# Altium PCB main_pcb.PcbDoc (part 1 of 2)
Units mm, origin at the board's own origin, x right, y up, seen from the top; angles counter-clockwise.
Board outline 134.57 x 151.73 mm, 2 copper layers (Top Layer, Bottom Layer); 69 components, 251 nets, 826 pads, 101 vias.
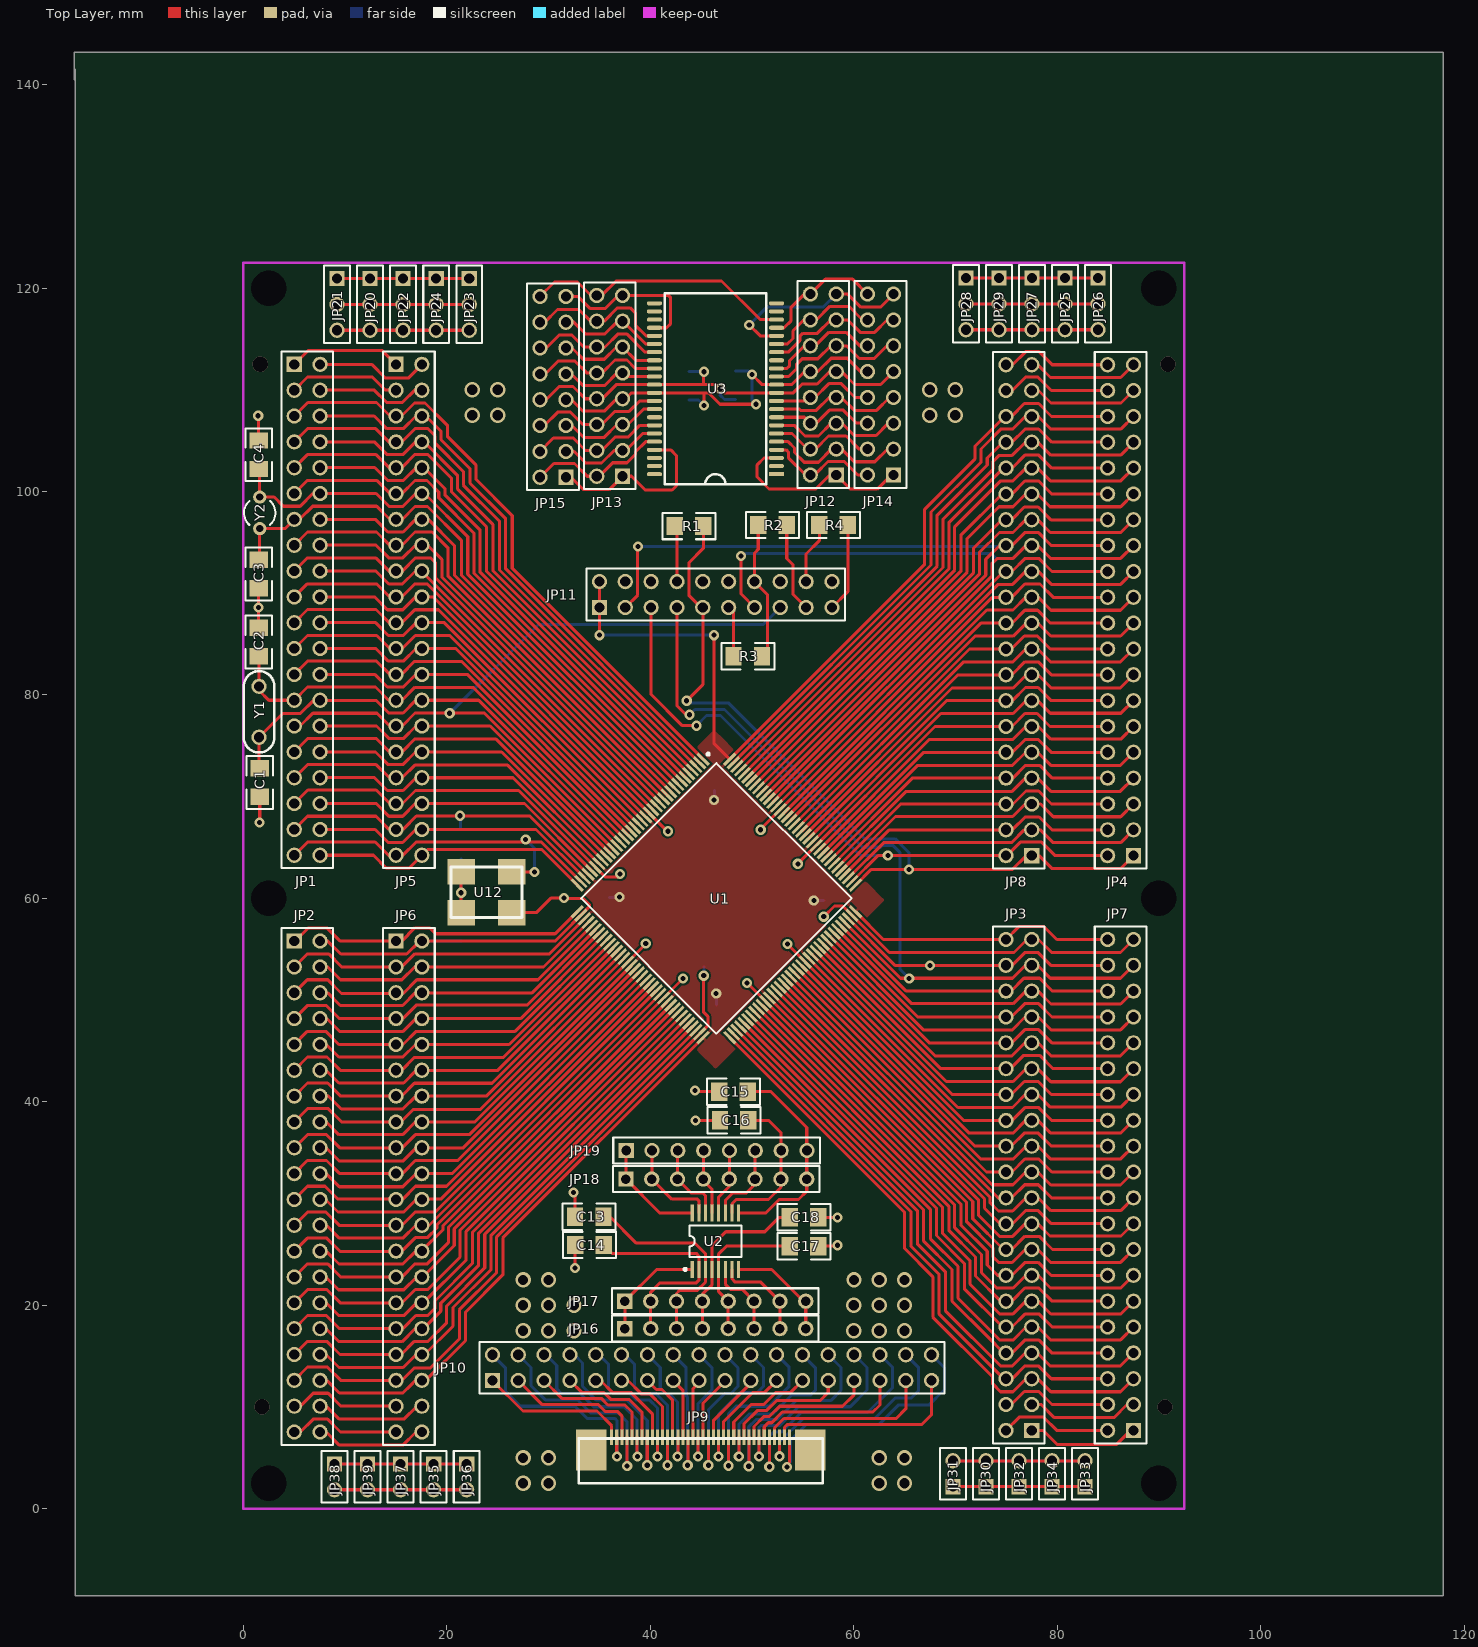
[diagram p0: Top Layer view]
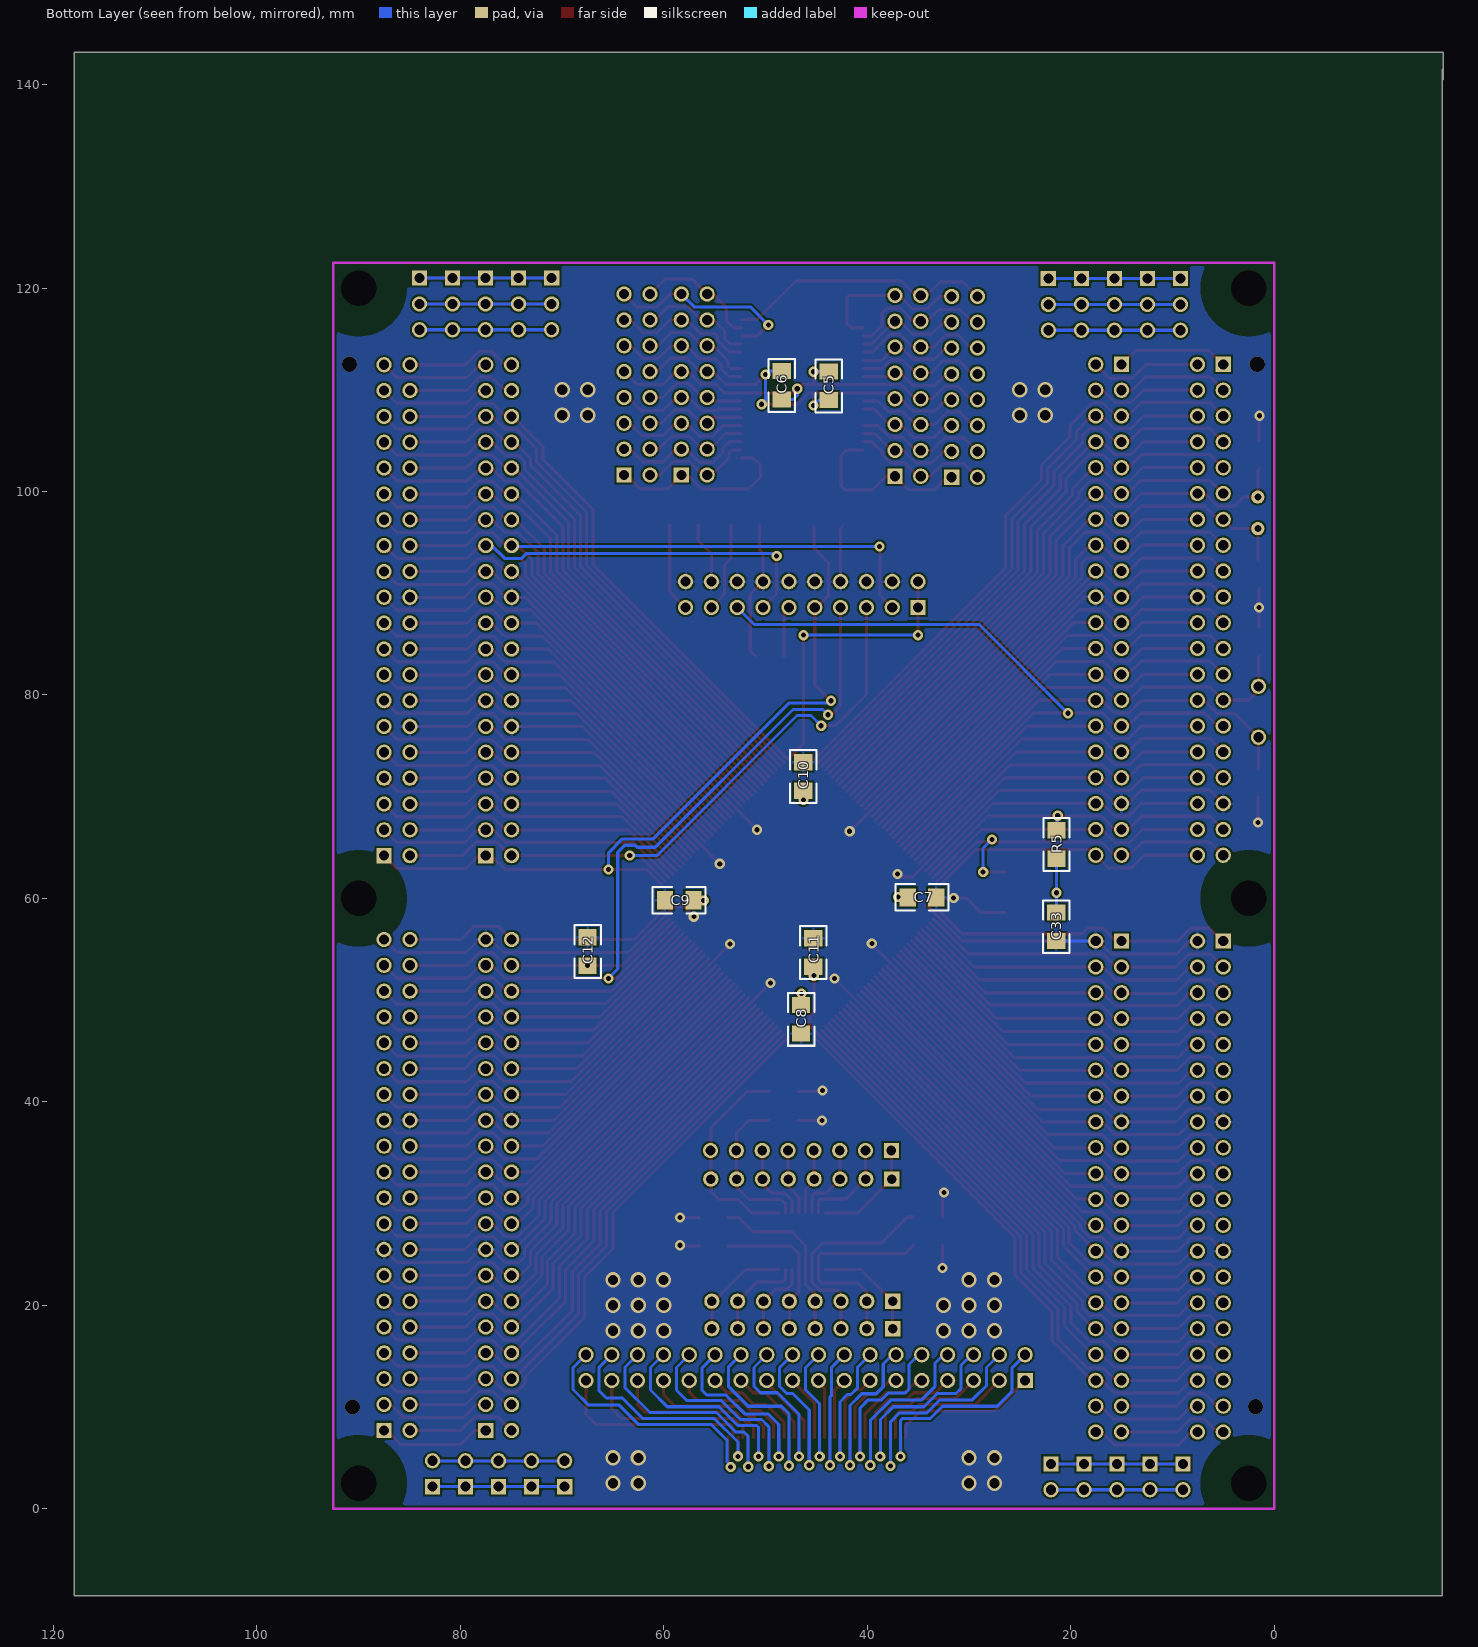
[diagram p1: Bottom Layer view, seen from below]

## Layer stack, top to bottom
Top Layer: signal copper 0.0356
Dielectric: dielectric 0.32, FR-4, Dk 4.8
Bottom Layer: signal copper 0.0356

## Board outline
-16.525,141.5 -16.525,-8.55 117.95,-8.55 117.95,143.175 -16.625,143.175 -16.625,140.5

## Design rules (kind name [scope] priority, off if disabled: settings)
Clearance Clearance_1 [HasPad('Free-0') vs InPoly] p1: gap=3
Clearance [All] p2: gap=0.2
ComponentClearance [All] p1: gap=0.254 collisioncheckmode=0
HoleSize [All] p1: absolutevalues=TRUE maxlimit=5 minlimit=0.4 maxpercent=80.000 minpercent=20.000
PolygonConnect [All] p1: connectstyle=Relief reliefconductorwidth=0.254 reliefentries=4 polygonreliefangle="90 Angle"
RoutingLayers [All] p1: top layer=Horizontal bottom layer=Vertical
RoutingVias [All] p1: holewidth=0.5 width=1 viastyle="Through Hole" minholewidth=0.4 minwidth=0.9 maxholewidth=1 maxwidth=1.5
SolderMaskExpansion [All] p1: expansion=0.102
TestPointUsage [All] p1: valid=0 allowmultiple=FALSE
Testpoint [All] p1: side=15 testpointundercomponent=TRUE minsize=1.016 maxsize=2.54 preferedsize=1.524 minholesize=0 maxholesize=1.016 preferedholesize=0.813 testpointgrid=0.025 style=1023 order=1234567890
Width [All] p1: maxlimit=2 minlimit=0.254 preferedwidth=0.254 toplayer_prefwidth=0.3 bottomlayer_prefwidth=0.3 minimp=50.000000 maximp=50.000000 favimp=50.000000
15 further rules are at their usual default settings.

## Components (designator, comment, footprint, x,y, rotation, side; value= is the part's Value field where it differs from the comment)
C1 "10" _1206 1.6,71.4 r90 top (schematic designator C?)
C2 "10" _1206 1.5,85.2 r270 top (schematic designator C?)
C3 "10" _1206 1.5,91.9 r90 top
C4 "10" _1206 1.5,103.6 r270 top
C5 "1.0" _1206 43.8,110.4 r90 bottom
C6 "1.0" _1206 48.39,110.424 r270 bottom
C7 "1.0" _1206 34.6,60.1 r180 bottom
C8 "1.0" _1206 46.5,48.1 r270 bottom
C9 "1.0" _1206 58.5,59.8 r0 bottom
C10 "1.0" _1206 46.3,72 r90 bottom
C11 "10.0" _1206 45.3,54.7 r90 bottom
C12 "10.0" _1206 67.5,54.8 r90 bottom
C13 "0.1" _1206 34,28.7 r0 top
C14 "0.1" _1206 34.027,25.933 r0 top
C15 "0.1" _1206 48.2,41 r0 top
C16 "0.1" _1206 48.252,38.185 r0 top
C17 "0.1" _1206 55.1,25.8 r180 top
C18 "0.1" _1206 55.098,28.64 r180 top
C33 "0.1" _1206 21.4,57.2 r270 bottom
JP1 "Header 20X2" HDR2X20#1 5,112.5 r270 top
JP2 "Header 20X2" HDR2X20#1 5,55.8 r270 top
JP3 "Header 20X2" HDR2X20#2 77.5,7.7 r90 top
JP4 "Header 20X2" HDR2X20#1 87.5,64.2 r90 top
JP5 "Header 20X2" HDR2X20#1 15,112.5 r270 top (schematic designator JP2)
JP6 "Header 20X2" HDR2X20#1 15,55.8 r270 top
JP7 "Header 20X2" HDR2X20#1 87.5,7.7 r90 top
JP8 "Header 20X2" HDR2X20#1 77.5,64.2 r90 top
JP9 "Header 36" 3-1734592-6 44.95,6.4 r0 top (schematic designator JP?)
JP10 "Header 36" HDR2X18 24.475,12.6 r0 top
JP11 "Header 10X2" HDR2X10 35,88.6 r0 top
JP12 "Header 16" HDR2X8 58.275,101.625 r90 top
JP13 "Header 16" HDR2X8 37.275,101.5 r90 top
JP14 "Header 16" HDR2X8 63.9,101.625 r90 top
JP15 "Header 16" HDR2X8 31.7,101.4 r90 top
JP16 "Header 8" HDR1X8 37.5,17.7 r0 top
JP17 "Header 8" HDR1X8 37.5,20.4 r0 top
JP18 "Header 8" HDR1X8 37.6,32.4 r0 top
JP19 "Header 8" HDR1X8 37.626,35.209 r0 top
JP20 "Header 3" HDR1X3 12.44,120.924 r270 top
JP21 "Header 3" HDR1X3 9.192,120.924 r270 top
JP22 "Header 3" HDR1X3 15.688,120.924 r270 top
JP23 "Header 3" HDR1X3 22.184,120.924 r270 top
JP24 "Header 3" HDR1X3 18.936,120.924 r270 top
JP25 "Header 3" HDR1X3 80.757,120.974 r270 top
JP26 "Header 3" HDR1X3 84.005,120.974 r270 top
JP27 "Header 3" HDR1X3 77.509,120.974 r270 top
JP28 "Header 3" HDR1X3 71.013,120.974 r270 top
JP29 "Header 3" HDR1X3 74.261,120.974 r270 top
JP30 "Header 2" HDR1X2 73.007,2.176 r90 top
JP31 "Header 2" HDR1X2 69.759,2.176 r90 top
JP32 "Header 2" HDR1X2 76.255,2.176 r90 top
JP33 "Header 2" HDR1X2 82.751,2.176 r90 top
JP34 "Header 2" HDR1X2 79.503,2.176 r90 top
JP35 "Header 2" HDR1X2 18.686,4.399 r270 top
JP36 "Header 2" HDR1X2 21.934,4.399 r270 top
JP37 "Header 2" HDR1X2 15.438,4.399 r270 top
JP38 "Header 2" HDR1X2 8.942,4.399 r270 top
JP39 "Header 2" HDR1X2 12.19,4.399 r270 top
R1 "10K" _1206 43.8,96.6 r180 top
R2 "10K" _1206 52,96.7 r180 top
R3 "10K" _1206 49.6,83.8 r0 top
R4 "10K" _1206 58,96.7 r180 top
R5 "1R" _1206 21.4,65.3 r90 bottom
U1 "STM32F207ZGT6" F-QFP20X20-G144/N 46.5,60 r315 top
U2 "TSC2046" TSSO5X6-G16 46.4,26.3 r0 top
U3 "K6R4008V1D" 44-TSOP2 46.4,110.1 r90 top
U12 "KXO-97-50MGz" KXO-97 23.9,60.6 r0 top
Y1 "10MGz" qwarz1 1.538,75.837 r90 top (schematic designator Y?)
Y2 "32768" BCY-W2/D3.1 1.6,97.9 r0 top

## Footprints (in the part's own frame and the unit in brackets; to place one, negate y for a bottom-side part, rotate by r counter-clockwise, add the part's x,y. Pads: shape width x height; smd on the part's side, far side on the other; paste and mask are expansions set on the pad)
3-1734592-6 [mm]
  rect 3x4 smd: 0(-10.75,-0.625) 0(10.75,-0.625)
  rect 0.3x1.5 smd: 1(-8.75,0.625) 2(-8.25,0.625) 3(-7.75,0.625) 4(-7.25,0.625) 5(-6.75,0.625) 6(-6.25,0.625) 7(-5.75,0.625) 8(-5.25,0.625) 9(-4.75,0.625) 10(-4.25,0.625) 11(-3.75,0.625) 12(-3.25,0.625) 13(-2.75,0.625) 14(-2.25,0.625) 15(-1.75,0.625) 16(-1.25,0.625) 17(-0.75,0.625) 18(-0.25,0.625) 19(0.25,0.625) 20(0.75,0.625) 21(1.25,0.625) 22(1.75,0.625) 23(2.25,0.625) 24(2.75,0.625) 25(3.25,0.625) 26(3.75,0.625) 27(4.25,0.625) 28(4.75,0.625) 29(5.25,0.625) 30(5.75,0.625) 31(6.25,0.625) 32(6.75,0.625) 33(7.25,0.625) 34(7.75,0.625) 35(8.25,0.625) 36(8.75,0.625)
  silkscreen extent -12,-3.9 12,0.5
44-TSOP2 [mm]
  rect 0.4x1.5 smd: 1(-8.4,-6)
  oval 0.4x1.5 smd: 2(-7.6,-6) 3(-6.8,-6) 4(-6,-6) 5(-5.2,-6) 6(-4.4,-6) 7(-3.6,-6) 8(-2.8,-6) 9(-2,-6) 10(-1.2,-6) 11(-0.4,-6) 12(0.4,-6) 13(1.2,-6) 14(2,-6) 15(2.8,-6) 16(3.6,-6) 17(4.4,-6) 18(5.2,-6) 19(6,-6) 20(6.8,-6) 21(7.6,-6) 22(8.4,-6) 23(8.4,6) 24(7.6,6) 25(6.8,6) 26(6,6) 27(5.2,6) 28(4.4,6) 29(3.6,6) 30(2.8,6) 31(2,6) 32(1.2,6) 33(0.4,6) 34(-0.4,6) 35(-1.2,6) 36(-2,6) 37(-2.8,6) 38(-3.6,6) 39(-4.4,6) 40(-5.2,6) 41(-6,6) 42(-6.8,6) 43(-7.6,6) 44(-8.4,6)
  silkscreen extent -9.4,-5 9.4,5
_1206 [mm]
  rect 1.6x1.8 smd: 1(-1.412,-0.007) 2(1.388,-0.007)
  silkscreen extent -2.61,-1.31 2.59,1.29
BCY-W2/D3.1 [mm]
  round 1.3 hole 0.7: 1(0,1.55) 2(0,-1.55)
  silkscreen extent -1.55,-1.19 1.55,1.17
F-QFP20X20-G144/N [mm]
  rect 1.6x0.3 smd: 1(-10.6,8.75) 2(-10.6,8.25) 3(-10.6,7.75) 4(-10.6,7.25) 5(-10.6,6.75) 6(-10.6,6.25) 7(-10.6,5.75) 8(-10.6,5.25) 9(-10.6,4.75) 10(-10.6,4.25) 11(-10.6,3.75) 12(-10.6,3.25) 13(-10.6,2.75) 14(-10.6,2.25) 15(-10.6,1.75) 16(-10.6,1.25) 17(-10.6,0.75) 18(-10.6,0.25) 19(-10.6,-0.25) 20(-10.6,-0.75) 21(-10.6,-1.25) 22(-10.6,-1.75) 23(-10.6,-2.25) 24(-10.6,-2.75) 25(-10.6,-3.25) 26(-10.6,-3.75) 27(-10.6,-4.25) 28(-10.6,-4.75) 29(-10.6,-5.25) 30(-10.6,-5.75) 31(-10.6,-6.25) 32(-10.6,-6.75) 33(-10.6,-7.25) 34(-10.6,-7.75) 35(-10.6,-8.25) 36(-10.6,-8.75) 73(10.6,-8.75) 74(10.6,-8.25) 75(10.6,-7.75) 76(10.6,-7.25) 77(10.6,-6.75) 78(10.6,-6.25) 79(10.6,-5.75) 80(10.6,-5.25) 81(10.6,-4.75) 82(10.6,-4.25) 83(10.6,-3.75) 84(10.6,-3.25) 85(10.6,-2.75) 86(10.6,-2.25) 87(10.6,-1.75) 88(10.6,-1.25) 89(10.6,-0.75) 90(10.6,-0.25) 91(10.6,0.25) 92(10.6,0.75) 93(10.6,1.25) 94(10.6,1.75) 95(10.6,2.25) 96(10.6,2.75) 97(10.6,3.25) 98(10.6,3.75) 99(10.6,4.25) 100(10.6,4.75) 101(10.6,5.25) 102(10.6,5.75) 103(10.6,6.25) 104(10.6,6.75) 105(10.6,7.25) 106(10.6,7.75) 107(10.6,8.25) 108(10.6,8.75)
  rect 0.3x1.6 smd: 37(-8.75,-10.6) 38(-8.25,-10.6) 39(-7.75,-10.6) 40(-7.25,-10.6) 41(-6.75,-10.6) 42(-6.25,-10.6) 43(-5.75,-10.6) 44(-5.25,-10.6) 45(-4.75,-10.6) 46(-4.25,-10.6) 47(-3.75,-10.6) 48(-3.25,-10.6) 49(-2.75,-10.6) 50(-2.25,-10.6) 51(-1.75,-10.6) 52(-1.25,-10.6) 53(-0.75,-10.6) 54(-0.25,-10.6) 55(0.25,-10.6) 56(0.75,-10.6) 57(1.25,-10.6) 58(1.75,-10.6) 59(2.25,-10.6) 60(2.75,-10.6) 61(3.25,-10.6) 62(3.75,-10.6) 63(4.25,-10.6) 64(4.75,-10.6) 65(5.25,-10.6) 66(5.75,-10.6) 67(6.25,-10.6) 68(6.75,-10.6) 69(7.25,-10.6) 70(7.75,-10.6) 71(8.25,-10.6) 72(8.75,-10.6) 109(8.75,10.6) 110(8.25,10.6) 111(7.75,10.6) 112(7.25,10.6) 113(6.75,10.6) 114(6.25,10.6) 115(5.75,10.6) 116(5.25,10.6) 117(4.75,10.6) 118(4.25,10.6) 119(3.75,10.6) 120(3.25,10.6) 121(2.75,10.6) 122(2.25,10.6) 123(1.75,10.6) 124(1.25,10.6) 125(0.75,10.6) 126(0.25,10.6) 127(-0.25,10.6) 128(-0.75,10.6) 129(-1.25,10.6) 130(-1.75,10.6) 131(-2.25,10.6) 132(-2.75,10.6) 133(-3.25,10.6) 134(-3.75,10.6) 135(-4.25,10.6) 136(-4.75,10.6) 137(-5.25,10.6) 138(-5.75,10.6) 139(-6.25,10.6) 140(-6.75,10.6) 141(-7.25,10.6) 142(-7.75,10.6) 143(-8.25,10.6) 144(-8.75,10.6)
  silkscreen extent -10.72,-9.4 9.4,9.57
HDR1X2 [mm]
  rect 1.5x1.5 hole 1: 1(-0.005,0.012)
  round 1.5 hole 1: 2(2.535,0.012)
  silkscreen extent -1.28,-1.26 3.8,1.28
HDR1X3 [mm]
  rect 1.5x1.5 hole 1: 1(-0.009,0.011)
  round 1.5 hole 1: 2(2.531,0.011) 3(5.071,0.011)
  silkscreen extent -1.28,-1.26 6.34,1.28
HDR1X8 [mm]
  rect 1.5x1.5 hole 0.95: 1(-0.001,0.002)
  round 1.5 hole 0.95: 2(2.539,0.002) 3(5.079,0.002) 4(7.619,0.002) 5(10.159,0.002) 6(12.699,0.002) 7(15.239,0.002) 8(17.779,0.002)
  silkscreen extent -1.27,-1.27 19.05,1.27
HDR2X8 [mm]
  rect 1.5x1.5 hole 1: 1(0,0)
  round 1.5 hole 1: 2(0,2.54) 3(2.54,0) 4(2.54,2.54) 5(5.08,0) 6(5.08,2.54) 7(7.62,0) 8(7.62,2.54) 9(10.16,0) 10(10.16,2.54) 11(12.7,0) 12(12.7,2.54) 13(15.24,0) 14(15.24,2.54) 15(17.78,0) 16(17.78,2.54)
  silkscreen extent -1.27,-1.27 19.05,3.81
HDR2X10 [mm]
  rect 1.5x1.5 hole 1: 1(0,0)
  round 1.5 hole 1: 2(0,2.54) 3(2.54,0) 4(2.54,2.54) 5(5.08,0) 6(5.08,2.54) 7(7.62,0) 8(7.62,2.54) 9(10.16,0) 10(10.16,2.54) 11(12.7,0) 12(12.7,2.54) 13(15.24,0) 14(15.24,2.54) 15(17.78,0) 16(17.78,2.54) 17(20.32,0) 18(20.32,2.54) 19(22.86,0) 20(22.86,2.54)
  silkscreen extent -1.27,-1.27 24.13,3.81
HDR2X18 [mm]
  rect 1.5x1.5 hole 1: 1(0,0)
  round 1.5 hole 1: 2(0,2.54) 3(2.54,0) 4(2.54,2.54) 5(5.08,0) 6(5.08,2.54) 7(7.62,0) 8(7.62,2.54) 9(10.16,0) 10(10.16,2.54) 11(12.7,0) 12(12.7,2.54) 13(15.24,0) 14(15.24,2.54) 15(17.78,0) 16(17.78,2.54) 17(20.32,0) 18(20.32,2.54) 19(22.86,0) 20(22.86,2.54) 21(25.4,0) 22(25.4,2.54) 23(27.94,0) 24(27.94,2.54) 25(30.48,0) 26(30.48,2.54) 27(33.02,0) 28(33.02,2.54) 29(35.56,0) 30(35.56,2.54) 31(38.1,0) 32(38.1,2.54) 33(40.64,0) 34(40.64,2.54) 35(43.18,0) 36(43.18,2.54)
  silkscreen extent -1.27,-1.27 44.45,3.81
HDR2X20#1 [mm]
  rect 1.5x1.5 hole 1: 1(0,0)
  round 1.5 hole 1: 2(0,2.54) 3(2.54,0) 4(2.54,2.54) 5(5.08,0) 6(5.08,2.54) 7(7.62,0) 8(7.62,2.54) 9(10.16,0) 10(10.16,2.54) 11(12.7,0) 12(12.7,2.54) 13(15.24,0) 14(15.24,2.54) 15(17.78,0) 16(17.78,2.54) 17(20.32,0) 18(20.32,2.54) 19(22.86,0) 20(22.86,2.54) 21(25.4,0) 22(25.4,2.54) 23(27.94,0) 24(27.94,2.54) 25(30.48,0) 26(30.48,2.54) 27(33.02,0) 28(33.02,2.54) 29(35.56,0) 30(35.56,2.54) 31(38.1,0) 32(38.1,2.54) 33(40.64,0) 34(40.64,2.54) 35(43.18,0) 36(43.18,2.54) 37(45.72,0) 38(45.72,2.54) 39(48.26,0) 40(48.26,2.54)
  silkscreen extent -1.27,-1.27 49.53,3.81
HDR2X20#2 [mm]
  rect 1.5x1.5 hole 1: 1(0,0)
  round 1.5 hole 1: 2(0,2.54) 3(2.54,0) 4(2.54,2.54) 5(5.08,0) 6(5.08,2.54) 7(7.62,0) 8(7.62,2.54) 9(10.16,0) 10(10.16,2.54) 11(12.7,0) 12(12.7,2.54) 13(15.24,0) 14(15.24,2.54) 15(17.78,0) 16(17.78,2.54) 17(20.32,0) 18(20.32,2.54) 19(22.86,0) 20(22.86,2.54) 21(25.4,0) 22(25.4,2.54) 23(27.94,0) 24(27.94,2.54) 25(30.48,0) 26(30.475,2.525) 27(33.02,0) 28(33.02,2.54) 29(35.56,0) 30(35.56,2.54) 31(38.1,0) 32(38.1,2.54) 33(40.64,0) 34(40.64,2.54) 35(43.18,0) 36(43.18,2.54) 37(45.72,0) 38(45.72,2.54) 39(48.26,0) 40(48.26,2.54)
  silkscreen extent -1.27,-1.27 49.53,3.81
KXO-97 [mm]
  rect 2.7x2.5 smd: 1(-2.5,-2) 2(2.5,-2) 3(2.5,2) 4(-2.5,2)
  silkscreen extent -3.5,-2.5 3.5,2.5
qwarz1 [mm]
  round 1.5 hole 1: 1(0.008,0) 2(5.008,0)
  silkscreen extent -1.49,-1.5 6.51,1.5
TSSO5X6-G16 [mm]
  rect 0.3x1.65 smd: 1(-2.275,-2.775) 2(-1.625,-2.775) 3(-0.975,-2.775) 4(-0.325,-2.775) 5(0.325,-2.775) 6(0.975,-2.775) 7(1.625,-2.775) 8(2.275,-2.775) 9(2.275,2.775) 10(1.625,2.775) 11(0.975,2.775) 12(0.325,2.775) 13(-0.325,2.775) 14(-0.975,2.775) 15(-1.625,2.775) 16(-2.275,2.775)
  silkscreen extent -3.1,-2.9 2.55,1.55

## Part data
C1 C2 C3 C4 C5 C6 C7 C8 C9 C10 C11 C12 C13 C14 C15 C16 C17 C18: library part "Cap Semi", "Capacitor"
C33: library part "Cap Semi", "Capacitor (Semiconductor SIM Model)"
JP1 JP2 JP3 JP4 JP5 JP6 JP7 JP8: "Header, 20-Pin, Dual row"
JP9 JP10: "Header, 36-Pin"
JP11: "Header, 10-Pin, Dual row"
JP12 JP13 JP14 JP15: "Header, 16-Pin"
JP16 JP17 JP18 JP19: "Header, 8-Pin"
JP20 JP21 JP22 JP23 JP24 JP25 JP26 JP27 JP28 JP29: "Header, 3-Pin"
JP30 JP31 JP32 JP33 JP34 JP35 JP36 JP37 JP38 JP39: "Header, 2-Pin"
R1 R2 R3 R4 R5: library part Res2, "Resistor"
U1: "STM32 ARM-based 32-bit MCU Connectivity Line & Ethernet with 1024 kB Flash, 128 kB Internal RAM, -40 to +85°C Temperature, 144-Pin LQFP, Tray"
U12: library part KXO-97
Y1 Y2: library part XTAL, "Crystal Oscillator"

## Free pads (board coordinates)
  round 3 hole 3.5: 0(2.5,2.5) 0(2.5,60) 0(2.5,120) 0(90,2.5) 0(90,60) 0(90,120)

## Via types
v1: diameter 1, hole 0.5, Top Layer to Bottom Layer, 64 vias
v2: diameter 1.5, hole 1, Top Layer to Bottom Layer, 33 vias
v3: diameter 1.5, hole 1.5, Top Layer to Bottom Layer, 4 vias

## Nets (pads, with @x,y where several pads share a name; then routed paths per layer and width w, separated by ;. In a path a pad name is that pad's centre, name@x,y a point inside that pad or via, vN(x,y) a via of type N, cw(c..) or ccw(c..) an arc to the next point about the centre after c; other vN are vias at no path point)
+3V3: C7.1 C8.1 C9.1 C10.1 JP1.21 JP1.34 JP1.37 JP2.3 JP2.16 JP2.26 JP2.36 JP3.16 JP3.27 JP3.40 JP4.13 JP4.23 JP4.36 JP5.21 JP5.34 JP5.37 JP6.3 JP6.16 JP6.26 JP6.36 JP7.16 JP7.27 JP7.40 JP8.13 JP8.23 JP8.36 JP11.1 JP11.2 R5.2 U1.17 U1.30 U1.33 U1.39 U1.52 U1.62 U1.72 U1.84 U1.95 U1.108 U1.121 U1.131 U1.144 | length 567.8
  Top Layer w0.3: JP2.3@5,53.26 6.29,54.55 8.375,54.55 9.65,53.275 15.575,53.275 16.85,54.55 30.09,54.55 U1.39@33.525,57.985 ; JP1.37@5,66.78 6.295,68.075 13.025,68.075 14.3,66.8 15.7,66.8 17,68.1 28.147,68.1 U1.33@33.878,62.369 ; JP1.21@5,87.1 6.3,88.4 13.025,88.4 14.325,87.1 15.575,87.1 16.85,88.375 19.186,88.375 U1.17@39.535,68.026 ; JP2.36@7.54,12.62 8.18,12.62 9.425,11.375 15.675,11.375 16.4,12.1 16.92,12.62 17.92,12.62 21.825,16.525 21.825,19.325 25.5,23 25.5,26.626 U1.72@45.192,46.317 ; JP2.26@7.54,25.32 8.13,25.32 9.4,24.05 15.675,24.05 16.945,25.32 JP6.26@17.54,25.32 17.545,25.325 17.545,25.345 19.6,27.4 19.6,27.797 U1.62@41.656,49.853 ; JP2.16@7.54,38.02 8.13,38.02 9.375,36.775 15.65,36.775 16.895,38.02 22.752,38.02 U1.52@38.121,53.389 ; JP1.34@7.54,71.86 7.555,71.875 12.875,71.875 14.15,70.6 15.7,70.6 16.96,71.86 JP5.34@17.54,71.86 26.508,71.86 U1.30@34.939,63.429 ; v1(35,85.875) JP11.2@35,91.14 ; v1(46.25,85.875) 46.25,75.241 U1.144@47.808,73.682 66.975,92.849 66.975,98.25 71.9,103.175 71.9,104.425 74.855,107.38 JP8.36@74.96,107.38 74.98,107.4 75.525,107.4 76.775,108.65 78.175,108.65 79.445,107.38 JP4.36@84.96,107.38 ; U1.84@51.697,50.207 71.7,30.204 71.7,28.5 74.72,25.48 JP3.16@74.96,25.48 75.53,25.48 76.825,26.775 78.25,26.775 79.545,25.48 JP7.16@84.96,25.48 ; U1.131@52.404,69.086 74.193,90.875 75.625,90.875 76.9,92.15 78.15,92.15 79.425,90.875 86.235,90.875 JP4.23@87.5,92.14 ; U1.95@55.586,54.096 70.232,39.45 75.6,39.45 76.87,40.72 78.08,40.72 79.325,39.475 86.255,39.475 JP7.27@87.5,40.72 ; U1.121@55.94,65.551 68.564,78.175 75.675,78.175 76.94,79.44 78.085,79.44 79.325,78.2 86.26,78.2 JP4.13@87.5,79.44 ; U1.108@60.183,58.692 62.914,55.96 JP3.40@74.96,55.96 76.225,57.225 78.7,57.225 79.965,55.96 JP7.40@84.96,55.96
  Bottom Layer w0.3: v1(21.275,68.125) 21.325,68.075 R5.2@21.325,66.78 ; v1(35,85.875) v1(46.25,85.875) ; C7.1@36.012,60.093 36.943,60.093 v1(36.975,60.125) ; v1(46.275,69.675) 46.293,69.693 C10.1@46.293,70.587 ; v1(46.475,50.662) 46.506,50.631 C8.1@46.506,49.512 ; v1(56.075,59.8) 56.082,59.807 C9.1@57.087,59.807
A0: JP12.1 JP14.1 U3.3 | length 19
  Top Layer w0.3: U3.3@52.4,103.3 51.175,103.3 50.5,102.625 50.5,101.425 51.675,100.25 56.275,100.25 57.65,101.625 JP12.1@58.275,101.625 59.675,100.225 62.3,100.225 63.7,101.625 JP14.1@63.9,101.625
A1: JP12.2 JP14.2 U3.4 | length 11.5
  Top Layer w0.3: U3.4@52.4,104.1 53.35,104.1 53.575,103.875 53.575,103.325 55.275,101.625 JP12.2@55.735,101.625 56.325,101.625 56.325,101.8 57.475,102.95 59.075,102.95 60.4,101.625 JP14.2@61.4,101.625
A2: JP12.3 JP14.3 U3.5 | length 14.2
  Top Layer w0.3: U3.5@52.4,104.9 53.55,104.9 54.175,104.275 54.175,103.825 55.125,102.875 56.525,102.875 57.8,104.15 58.26,104.15 JP12.3@58.275,104.165 58.81,104.165 60.05,102.925 62.075,102.925 63.315,104.165 JP14.3@63.9,104.165
A3: JP12.4 JP14.4 U3.6 | length 10.7
  Top Layer w0.3: U3.6@52.4,105.7 53.925,105.7 55.45,104.175 56.25,104.175 57.525,105.45 59.25,105.45 60.535,104.165 JP14.4@61.36,104.165
A4: JP12.5 JP14.5 U3.7 | length 13.5
  Top Layer w0.3: U3.7@52.4,106.5 54.15,106.5 55.2,105.45 56.525,105.45 57.78,106.705 58.845,106.705 60.05,105.5 62.2,105.5 63.405,106.705 JP14.5@63.9,106.705
A5: JP12.13 JP14.13 U3.16 | length 14.1
  Top Layer w0.3: U3.16@52.4,113.7 53.575,113.7 54.7,114.825 54.7,115.25 55,115.55 56.425,115.55 57.74,116.865 58.86,116.865 59.41,116.865 60.625,115.65 62.05,115.65 63.265,116.865 JP14.13@63.9,116.865
A6: JP12.14 JP14.14 U3.17 | length 11.5
  Top Layer w0.3: U3.17@52.4,114.5 53.475,114.5 54.025,115.05 54.025,115.8 54.666,116.441 55.09,116.865 56.315,116.865 57.65,118.2 59.525,118.2 60.86,116.865 JP14.14@61.36,116.865
A7: JP12.15 JP14.15 U3.18 | length 19.6
  Top Layer w0.3: v1(49.725,116.375) 50.8,115.3 U3.18@52.4,115.3 ; JP12.15@58.275,119.405 59.42,119.405 60.7,118.125 62.62,118.125 JP14.15@63.9,119.405
  Bottom Layer w0.3: v1(49.725,116.375) 51.5,118.15 57.02,118.15 JP12.15@58.275,119.405
A8: JP12.16 JP14.16 U3.19 | length 12.3
  Top Layer w0.3: U3.19@52.4,116.1 53.15,116.1 53.85,116.8 53.85,118.125 55.13,119.405 JP12.16@55.735,119.405 57.205,120.875 59.89,120.875 JP14.16@61.36,119.405
A9: JP13.16 JP15.16 U3.20 | length 26.6
  Top Layer w0.3: JP15.16@29.16,119.18 30.58,120.6 32.85,120.6 34.225,119.225 34.68,119.225 JP13.16@34.735,119.28 35.23,119.28 36.65,120.7 47,120.7 50.8,116.9 U3.20@52.4,116.9
A10: JP13.15 JP15.15 U3.26 | length 15.7
  Top Layer w0.3: JP15.15@31.7,119.18 32.87,119.18 34.05,118 35.6,118 36.88,119.28 41.77,119.28 42,119.05 42,116.5 41.6,116.1 U3.26@40.4,116.1
A11: JP13.14 JP15.14 U3.27 | length 14.6
  Top Layer w0.3: JP15.14@29.16,116.64 29.615,116.64 30.875,117.9 32.975,117.9 34.135,116.74 JP13.14@34.735,116.74 35.465,116.74 36.775,118.05 38.025,118.05 38.525,117.55 38.525,116.35 39.575,115.3 U3.27@40.4,115.3
A12: JP13.13 JP15.13 U3.28 | length 10.6
  Top Layer w0.3: JP15.13@31.7,116.64 32.485,116.64 33.65,115.475 35.525,115.475 36.79,116.74 37.31,116.74 39.55,114.5 U3.28@40.4,114.5
A13: JP13.12 JP15.12 U3.29 | length 13.6
  Top Layer w0.3: JP15.12@29.16,114.1 29.775,114.1 31.075,115.4 32.25,115.4 33.45,114.2 JP13.12@34.735,114.2 35.55,114.2 36.85,115.5 37.675,115.5 39.475,113.7 U3.29@40.4,113.7
A14: JP13.11 JP15.11 U3.30 | length 10.2
  Top Layer w0.3: JP15.11@31.7,114.1 32.3,114.1 33.4,113 35.475,113 36.675,114.2 JP13.11@37.275,114.2 38.575,112.9 U3.30@40.4,112.9
A15: JP13.4 JP15.4 U3.38 | length 13.3
  Top Layer w0.3: JP15.4@29.16,103.94 30.47,105.25 32.425,105.25 33.635,104.04 35.24,104.04 36.575,105.375 37.85,105.375 38.975,106.5 U3.38@40.4,106.5
A16: JP13.3 JP15.3 U3.39 | length 10.1
  Top Layer w0.3: JP15.3@31.7,103.94 32.51,103.94 33.65,102.8 35.2,102.8 36.44,104.04 JP13.3@37.275,104.04 ; JP13.3@37.59,104.04 39.25,105.7 U3.39@40.4,105.7
A17: JP13.2 JP15.2 U3.40 | length 13.9
  Top Layer w0.3: JP15.2@29.16,101.4 30.51,102.75 32.55,102.75 33.8,101.5 JP13.2@34.735,101.5 34.975,101.5 36.3,102.825 37.7,102.825 38.55,103.675 38.55,103.9 39.55,104.9 U3.40@40.4,104.9
A18: JP13.1 JP15.1 U3.41 | length 18
  Top Layer w0.3: JP15.1@31.7,101.4 32.2,101.4 33.425,100.175 35.95,100.175 JP13.1@37.275,101.5 38.15,101.5 39.5,100.15 42.15,100.15 42.575,100.575 42.575,103.525 42,104.1 U3.41@40.4,104.1
BOOT0: JP4.30 JP8.30 U1.138 | length 49.8
  Top Layer w0.3: U1.138@49.929,71.561 70.525,92.157 70.525,95.7 74.585,99.76 JP8.30@74.96,99.76 74.975,99.775 75.575,99.775 76.825,101.025 78.2,101.025 79.465,99.76 JP4.30@84.96,99.76
CS: JP12.6 JP14.6 U3.8 | length 10.3
  Top Layer w0.3: U3.8@52.4,107.3 55.14,107.3 55.74,106.7 56.3,106.7 57.6,108 58.975,108 60.25,106.725 61.34,106.725 JP14.6@61.36,106.705
D0: JP12.7 JP14.7 U3.9 | length 13.1
  Top Layer w0.3: U3.9@52.4,108.1 54.65,108.1 54.775,107.975 56.325,107.975 57.595,109.245 58.78,109.245 60.05,107.975 62.25,107.975 63.52,109.245 JP14.7@63.9,109.245
D1: JP12.8 JP14.8 U3.10 | length 10.2
  Top Layer w0.3: U3.10@52.4,108.9 55.39,108.9 JP12.8@55.735,109.245 56.195,109.245 57.55,110.6 58.775,110.6 60.13,109.245 JP14.8@61.36,109.245
D2: JP12.11 JP14.11 U3.13 | length 14
  Top Layer w0.3: U3.13@52.4,111.3 53.6,111.3 54.35,112.05 54.35,112.475 54.925,113.05 56.475,113.05 57.725,114.3 59.325,114.3 60.55,113.075 62.025,113.075 63.275,114.325 JP14.11@63.9,114.325
D3: JP12.12 JP14.12 U3.14 | length 11.3
  Top Layer w0.3: U3.14@52.4,112.1 53.425,112.1 53.7,112.375 53.7,112.875 55.15,114.325 56.225,114.325 57.55,115.65 59.25,115.65 60.575,114.325 JP14.12@61.36,114.325
D4: JP13.10 JP15.10 U3.31 | length 13.1
  Top Layer w0.3: JP15.10@29.16,111.56 29.685,111.56 30.975,112.85 32.55,112.85 33.74,111.66 JP13.10@34.735,111.66 35.26,111.66 36.525,112.925 37.7,112.925 38.525,112.1 U3.31@40.4,112.1
D5: JP13.9 JP15.9 U3.32 | length 9.9
  Top Layer w0.3: JP15.9@31.7,111.56 32.24,111.56 33.4,110.4 35.5,110.4 36.76,111.66 JP13.9@37.275,111.66 37.635,111.3 U3.32@40.4,111.3
D6: JP13.6 JP15.6 U3.35 | length 13.3
  Top Layer w0.3: JP15.6@29.16,106.48 29.58,106.48 30.9,107.8 32.15,107.8 33.37,106.58 34.095,106.58 JP13.6@34.735,106.58 35.23,106.58 36.525,107.875 37.925,107.875 38.95,108.9 U3.35@40.4,108.9
D7: JP13.5 JP15.5 U3.36 | length 10.3
  Top Layer w0.3: JP15.5@31.7,106.48 32.27,106.48 33.425,105.325 35.475,105.325 36.73,106.58 JP13.5@37.275,106.58 37.805,106.58 39.325,108.1 U3.36@40.4,108.1
GND: C1.1 C2.1 C3.1 C4.1 C7.2 C8.2 C9.2 C10.2 C11.2 C12.2 C13.1 C14.1 C15.1 C16.1 C17.1 C18.1 C33.2 JP1.20 JP1.35 JP2.2 JP2.15 JP2.25 JP3.15 JP3.26 JP3.39 JP4.12 JP4.22 JP5.20 JP5.35 JP6.2 JP6.15 JP6.25 JP7.15 JP7.26 JP7.39 JP8.12 JP8.22 JP11.4 JP11.6 JP11.8 JP11.10 JP11.12 JP11.14 JP11.16 JP11.18 JP11.20 R1.2 R2.2 R3.2 R4.2 U1.16 U1.31 U1.38 U1.51 U1.61 U1.83 U1.94 U1.107 U1.120 U1.130 U12.2 | length 473.5
  Top Layer w0.3: v1(1.45,107.45) 1.493,107.407 C4.1@1.493,105.012 ; C2.1@1.493,86.612 1.493,90.474 C3.1@1.507,90.488 ; v1(1.575,67.45) 1.607,67.482 C1.1@1.607,69.988 ; JP2.25@5,25.32 6.28,26.6 8.2,26.6 9.5,25.3 15.55,25.3 16.9,26.65 18.075,26.65 19.025,27.6 19.025,27.929 U1.61@41.303,50.207 43.221,52.125 v1(43.225,52.125) ; JP2.15@5,38.02 6.305,39.325 8.35,39.325 9.655,38.02 15.47,38.02 16.675,39.225 23.25,39.225 39.55,55.525 v1(39.55,55.55) ; JP1.35@5,69.32 6.33,70.65 13.05,70.65 14.38,69.32 15.645,69.32 16.925,70.6 27.061,70.6 35.561,62.1 36.75,62.1 37.05,62.4 v1(37.025,62.4) ; JP2.2@7.54,55.8 8.3,55.8 9.575,54.525 16.05,54.525 17.325,55.8 30.633,55.8 34,59.167 34,59.375 33.4,59.975 31.55,59.975 v1(31.5,60.025) 30.225,60.025 28.8,58.6 U12.2@26.4,58.6 ; JP1.20@7.54,89.64 12.885,89.64 14.15,88.375 15.675,88.375 16.94,89.64 18.628,89.64 41.668,66.6 v1(41.725,66.6) ; v1(32.45,31.075) 32.588,30.937 C13.1@32.588,28.693 ; v1(32.6,23.65) 32.615,23.665 C14.1@32.615,25.926 ; R1.2@42.412,96.607 42.62,96.399 JP11.8@42.62,91.14 ; v1@44.3,38.175 44.55,38.175 44.553,38.178 C16.1@46.84,38.178 ; v1(44.4,41.1) 44.507,40.993 C15.1@46.788,40.993 ; v1(49.5,51.697) 71.1,30.097 71.1,28.2 73.675,25.625 73.675,24.775 74.25,24.2 75.575,24.2 76.855,25.48 78.095,25.48 79.35,24.225 86.245,24.225 JP7.15@87.5,25.48 ; R2.2@50.612,96.707 50.612,94.312 50.24,93.94 JP11.14@50.24,91.14 51.5,89.88 51.5,84.306 R3.2@50.988,83.793 ; v1(50.85,66.75) 50.85,66.825 73.625,89.6 75.525,89.6 76.825,90.9 78.3,90.9 79.6,89.6 JP4.22@84.96,89.6 ; v1(53.5,55.5) 53.5,55.475 U1.94@55.233,53.742 70.795,38.18 74.97,38.18 75.58,38.18 76.825,39.425 78.2,39.425 79.445,38.18 JP7.26@84.96,38.18 JP7.26@84.955,38.175 ; v1(54.5,63.4) 54.5,63.404 67.996,76.9 75.55,76.9 76.825,78.175 78.025,78.175 79.3,76.9 JP4.12@84.96,76.9 ; JP11.18@55.3,91 55.3,93.85 56.612,95.162 R4.2@56.612,96.707 ; C18.1@56.51,28.647 58.378,28.647 v1(58.4,28.625) ; C17.1@56.512,25.807 58.307,25.807 v1(58.4,25.9) ; v1(57.05,58.2) 58.11,59.26 58.908,59.26 63.492,54.675 75.75,54.675 77.035,55.96 78.165,55.96 79.45,54.675 86.215,54.675 JP7.39@87.5,55.96
  Bottom Layer w0.3: JP6.2@17.54,55.8 17.552,55.812 C33.2@21.407,55.812
  other v1: 44.45,38.175 1.493,88.6
  other v2: 27.5,2.5 30,2.5 62.5,2.5 65,2.5 27.5,5 30,5 62.5,5 65,5 27.5,17.5 30,17.5 32.5,17.5 60,17.5 62.5,17.5 65,17.5 27.5,20 30,20 32.5,20 60,20 62.5,20 65,20 27.5,22.5 30,22.5 60.025,22.5 62.5,22.5 65,22.5 22.5,107.5 25,107.5 67.475,107.5 69.975,107.5 22.5,110 25,110 67.475,110 69.975,110
  other v3: 90.6,10 1.825,10.025 1.65,112.5 90.9,112.5
GND_SRAM: C5.1 C6.1 JP12.10 JP13.7 JP14.10 JP15.7 U3.12 U3.34 | length 41.5
  Top Layer w0.3: JP15.7@31.7,109.02 32.255,109.02 33.375,107.9 35.475,107.9 36.695,109.12 37.57,109.12 38.15,109.7 45.725,109.7 46.85,108.575 v1(50.375,108.575) ; v1(45.275,108.45) 45.275,109.7 ; v1(50,111.5) 51,110.5 53.875,110.5 55.175,111.8 56.475,111.8 57.775,113.1 59.375,113.1 60.69,111.785 JP14.10@61.36,111.785
  Bottom Layer w0.3: C5.1@43.793,108.988 44.737,108.988 v1(45.275,108.45) ; C6.1@48.396,111.836 49.664,111.836 v1(50,111.5) 50,108.95 v1(50.375,108.575)
NetC13_2: C13.2 JP16.3 JP17.3 U2.3 | length 21.1
  Top Layer w0.3: C13.2@35.388,28.693 36.032,28.693 38.625,26.1 44.4,26.1 45.425,25.075 U2.3@45.425,23.525 45.425,22.275 44.625,21.475 42.9,21.475 42.579,21.154 JP17.3@42.579,20.402 JP16.3@42.579,17.702
NetC14_2: C14.2 JP16.2 JP17.2 U2.2 | length 21
  Top Layer w0.3: C14.2@35.415,25.926 36.241,25.1 44.525,25.1 44.775,24.85 44.775,22.45 44.525,22.2 40.95,22.2 40.039,21.289 JP16.2@40.039,17.702
NetC15_2: C15.2 JP18.8 JP19.8 U2.9 | length 21.1
  Top Layer w0.3: U2.9@48.675,29.075 51.35,29.075 52.675,30.4 54.575,30.4 55.379,31.204 55.379,37.471 51.857,40.993 C15.2@49.588,40.993
NetC16_2: C16.2 JP18.7 JP19.7 U2.10 | length 15.5
  Top Layer w0.3: U2.10@48.025,29.075 48.025,29.975 48.45,30.4 51.625,30.4 52.839,31.614 JP18.7@52.839,32.402 52.865,32.428 52.865,36.935 51.622,38.178 C16.2@49.64,38.178
NetC17_2: C17.2 JP16.5 JP17.5 U2.5 | length 15
  Top Layer w0.3: JP16.5@47.659,17.702 JP17.5@47.659,20.402 46.725,21.335 46.725,25.05 47.482,25.807 C17.2@53.712,25.807
NetC18_2: C18.2 JP16.4 JP17.4 U2.4 | length 17.4
  Top Layer w0.3: JP16.4@45.119,17.702 JP17.4@45.119,20.402 45.119,21.069 46.075,22.025 U2.4@46.075,23.525 46.075,25.875 47.425,27.225 51.25,27.225 52.672,28.647 C18.2@53.71,28.647
NetC33_1: C33.1 R5.1 U12.1 U12.4 | length 9.3
  Top Layer w0.3: U12.1@21.4,58.6 21.407,58.607 v1(21.407,60.55) 21.4,60.557 U12.4@21.4,62.6
  Bottom Layer w0.3: R5.1@21.393,63.888 21.407,63.874 C33.1@21.407,58.612
NetJP1_1: JP1.1 JP5.1 | length 11.1
  Top Layer w0.3: JP1.1@5,112.5 6.35,113.85 13.65,113.85 JP5.1@15,112.5
NetJP1_2: JP1.2 JP5.2 | length 11.1
  Top Layer w0.3: JP1.2@7.54,112.5 12.6,112.5 13.925,111.175 16.25,111.175 17.54,112.465 JP5.2@17.54,112.5
NetJP1_3: JP1.3 JP5.3 | length 11.1
  Top Layer w0.3: JP1.3@5,109.96 6.29,111.25 12.675,111.25 13.965,109.96 JP5.3@15,109.96
NetJP1_4: JP1.4 JP5.4 | length 11
  Top Layer w0.3: JP1.4@7.54,109.96 12.865,109.96 14.075,108.75 15.625,108.75 16.835,109.96 JP5.4@17.54,109.96
NetJP2_37: JP2.37 JP6.37 | length 11.1
  Top Layer w0.3: JP2.37@5,10.08 5.58,10.08 6.85,11.35 8.325,11.35 9.595,10.08 JP6.37@15,10.08
NetJP2_38: JP2.38 JP6.38 | length 11.1
  Top Layer w0.3: JP2.38@7.54,10.08 8.145,10.08 9.425,8.8 15.775,8.8 17.055,10.08 JP6.38@17.54,10.08
NetJP2_39: JP2.39 JP6.39 | length 11
  Top Layer w0.3: JP2.39@5,7.54 5.59,7.54 6.85,8.8 8.275,8.8 9.535,7.54 JP6.39@15,7.54
NetJP2_40: JP2.40 JP6.40 | length 11.1
  Top Layer w0.3: JP2.40@7.54,7.54 8.135,7.54 9.425,6.25 15.675,6.25 16.965,7.54 JP6.40@17.54,7.54
NetJP3_1: JP3.1 JP7.1 | length 11.1
  Top Layer w0.3: JP3.1@77.5,7.7 78.6,7.7 79.975,6.325 85.85,6.325 87.225,7.7 JP7.1@87.5,7.7
NetJP3_2: JP3.2 JP7.2 | length 11.1
  Top Layer w0.3: JP3.2@74.96,7.7 76.26,9 78.65,9 79.95,7.7 JP7.2@84.96,7.7
NetJP3_3: JP3.3 JP7.3 | length 11.1
  Top Layer w0.3: JP3.3@77.5,10.24 78.435,10.24 79.725,8.95 85.575,8.95 86.865,10.24 JP7.3@87.5,10.24
NetJP3_4: JP3.4 JP7.4 | length 11.1
  Top Layer w0.3: JP3.4@74.96,10.24 75.49,10.24 76.775,11.525 78.2,11.525 79.485,10.24 JP7.4@84.96,10.24
NetJP4_37: JP4.37 JP8.37 | length 11
  Top Layer w0.3: JP8.37@77.5,109.92 78.17,109.92 79.39,108.7 86.28,108.7 JP4.37@87.5,109.92
NetJP4_38: JP4.38 JP8.38 | length 11.1
  Top Layer w0.3: JP8.38@74.96,109.92 75.57,109.92 76.9,111.25 78.1,111.25 79.43,109.92 JP4.38@84.96,109.92
NetJP4_39: JP4.39 JP8.39 | length 11
  Top Layer w0.3: JP8.39@77.5,112.46 78.09,112.46 79.35,111.2 86.24,111.2 JP4.39@87.5,112.46
NetJP4_40: JP4.40 JP8.40 | length 11.1
  Top Layer w0.3: JP8.40@74.96,112.46 75.61,112.46 76.9,113.75 78.225,113.75 79.515,112.46 JP4.40@84.96,112.46
NetJP9_1: JP9.1 JP10.1 | length 14.7
  Top Layer w0.3: JP10.1@24.475,12.6 27.475,9.6 34.75,9.6 36.2,8.15 JP9.1@36.2,7.025
NetJP9_2: JP9.2 JP10.2 | length 21.7
  Top Layer w0.3: JP9.2@36.7,7.025 36.7,5.15 v1(36.725,5.125)
  Bottom Layer w0.3: JP10.2@24.475,15.14 25.75,13.865 25.75,11.55 27.225,10.075 32.6,10.075 33.825,8.85 36.55,8.85 36.725,8.675 v1(36.725,5.125)
NetJP9_3: JP9.3 JP10.3 | length 13.7
  Top Layer w0.3: JP10.3@27.015,12.6 29.39,10.225 34.9,10.225 35.55,9.575 36.75,9.575 37.2,9.125 JP9.3@37.2,7.025
NetJP9_4: JP9.4 JP10.4 | length 21.7
  Top Layer w0.3: JP9.4@37.7,7.025 37.7,4.225 v1(37.725,4.2)
  Bottom Layer w0.3: JP10.4@27.015,15.14 28.275,13.88 28.275,12.1 29.675,10.7 32.85,10.7 34.125,9.425 36.825,9.425 37.7,8.55 37.7,4.35 37.725,4.325 v1(37.725,4.2)
NetJP9_5: JP9.5 JP10.5 | length 12.4
  Top Layer w0.3: JP10.5@29.555,12.6 31.305,10.85 35.175,10.85 35.825,10.2 37.5,10.2 38.2,9.5 JP9.5@38.2,7.025
NetJP9_6: JP9.6 JP10.6 | length 18.7
  Top Layer w0.3: JP9.6@38.7,7.025 38.7,5.15 v1(38.725,5.125)
  Bottom Layer w0.3: JP10.6@29.555,15.14 29.735,15.14 30.8,14.075 30.8,11.8 31.275,11.325 33.125,11.325 34.425,10.025 37.45,10.025 38.7,8.775 38.7,5.15 v1(38.725,5.125)
NetJP9_7: JP9.7 JP10.7 | length 10.8
  Top Layer w0.3: JP10.7@32.095,12.6 33.295,11.4 35.45,11.4 36.1,10.75 37.9,10.75 39.2,9.45 JP9.7@39.2,7.025
NetJP9_8: JP9.8 JP10.8 | length 18.8
  Top Layer w0.3: v1(39.7,4.275) JP9.8@39.7,7.025
  Bottom Layer w0.3: JP10.8@32.095,15.14 32.51,15.14 33.325,14.325 33.325,12.05 34.7,10.675 37.7,10.675 39.7,8.675 v1(39.7,4.275)
NetJP9_9: JP9.9 JP10.9 | length 9.2
  Top Layer w0.3: JP10.9@34.635,12.6 35.1,12.6 36.3,11.4 38.125,11.4 40.2,9.325 JP9.9@40.2,7.025
NetJP9_10: JP9.10 JP10.10 | length 16.3
  Top Layer w0.3: v1(40.7,5.125) JP9.10@40.7,7.025
  Bottom Layer w0.3: JP10.10@34.635,15.14 34.935,15.14 35.9,14.175 35.9,11.725 36.25,11.375 37.925,11.375 38.6,10.7 39.9,10.7 40.7,9.9 v1(40.7,5.125)
NetJP9_11: JP9.11 JP10.11 | length 8.1
  Top Layer w0.3: JP10.11@37.175,12.6 37.8,12.6 39.1,11.3 39.95,11.3 41.2,10.05 JP9.11@41.2,7.025
NetJP9_12: JP9.12 JP10.12 | length 16.5
  Top Layer w0.3: v1(41.7,4.275) JP9.12@41.7,7.025
  Bottom Layer w0.3: JP10.12@37.175,15.14 37.51,15.14 38.425,14.225 38.425,11.975 39.1,11.3 40.55,11.3 41.7,10.15 v1(41.7,4.275)
NetJP9_13: JP9.13 JP10.13 | length 6.9
  Top Layer w0.3: JP10.13@39.715,12.6 40.59,11.725 41.15,11.725 42.2,10.675 JP9.13@42.2,7.025
NetJP9_14: JP9.14 JP10.14 | length 13.4
  Top Layer w0.3: v1(42.675,5.125) 42.7,5.15 JP9.14@42.7,7.025
  Bottom Layer w0.3: JP10.14@39.715,15.14 40.975,13.88 40.975,11.85 41.6,11.225 41.95,11.225 42.675,10.5 v1(42.675,5.125)
NetJP9_15: JP9.15 JP10.15 | length 6
  Top Layer w0.3: JP10.15@42.255,12.6 43.2,11.655 JP9.15@43.2,7.025
NetJP9_16: JP9.16 JP10.16 | length 14.2
  Top Layer w0.3: v1(43.675,4.275) 43.7,4.3 JP9.16@43.7,7.025
  Bottom Layer w0.3: JP10.16@42.255,15.14 43.525,13.87 43.525,11.1 43.675,10.95 v1(43.675,4.275)
NetJP9_17: JP9.17 JP10.17 | length 5.8
  Top Layer w0.3: JP9.17@44.2,7.025 44.2,11.8 44.795,12.395 JP10.17@44.795,12.6
NetJP9_18: JP9.18 JP10.18 | length 13
  Top Layer w0.3: v1(44.675,5.125) 44.7,5.15 JP9.18@44.7,7.025
  Bottom Layer w0.3: v1(44.675,5.125) 44.675,10.3 46.05,11.675 46.05,13.885 JP10.18@44.795,15.14
NetJP9_19: JP9.19 JP10.19 | length 6.5
  Top Layer w0.3: JP9.19@45.2,7.025 45.2,10.4 47.335,12.535 JP10.19@47.335,12.6
NetJP9_20: JP9.20 JP10.20 | length 15.7
  Top Layer w0.3: v1(45.7,4.275) JP9.20@45.7,7.025
  Bottom Layer w0.3: v1(45.7,4.275) 45.7,9.7 47.325,11.325 47.925,11.325 48.625,12.025 48.625,13.85 JP10.20@47.335,15.14
NetJP9_21: JP9.21 JP10.21 | length 7.1
  Top Layer w0.3: JP9.21@46.2,7.025 46.2,8.65 49.875,12.325 JP10.21@49.875,12.6
NetJP9_22: JP9.22 JP10.22 | length 15.2
  Top Layer w0.3: v1(46.7,5.125) 46.7,5.25 JP9.22@46.7,7.025
  Bottom Layer w0.3: v1(46.7,5.125) 46.7,9.275 48.825,11.4 50.5,11.4 51.125,12.025 51.125,13.89 JP10.22@49.875,15.14
NetJP9_23: JP9.23 JP10.23 | length 8.4
  Top Layer w0.3: JP9.23@47.2,7.025 47.2,8.55 50.05,11.4 51.215,11.4 JP10.23@52.415,12.6
NetJP9_24: JP9.24 JP10.24 | length 18.6
  Top Layer w0.3: v1(47.7,4.225) JP9.24@47.7,7.025
  Bottom Layer w0.3: v1(47.7,4.225) 47.7,9.325 48.45,10.075 51.7,10.075 53.65,12.025 53.65,13.905 JP10.24@52.415,15.14
NetJP9_25: JP9.25 JP10.25 | length 9.9
  Top Layer w0.3: JP9.25@48.2,7.025 48.2,8.525 49.925,10.25 51.15,10.25 52.3,11.4 53.755,11.4 JP10.25@54.955,12.6
NetJP9_26: JP9.26 JP10.26 | length 18
  Top Layer w0.3: v1(48.7,5.125) JP9.26@48.7,7.025
  Bottom Layer w0.3: v1(48.7,5.125) 48.7,8.275 49.75,9.325 52.05,9.325 53.9,11.175 55.775,11.175 56.225,11.625 56.225,13.87 JP10.26@54.955,15.14
NetJP9_27: JP9.27 JP10.27 | length 12
  Top Layer w0.3: JP9.27@49.2,7.025 49.2,8.325 50.55,9.675 51.45,9.675 52.4,10.625 56.675,10.625 57.495,11.445 JP10.27@57.495,12.6